# Altium PCB led_drv.PcbDoc
Units mm, origin at the board's own origin, x right, y up, seen from the top; angles counter-clockwise.
Board outline 90 x 50 mm, 2 copper layers (Top Layer, Bottom Layer); 122 components, 128 nets, 402 pads, 59 vias.
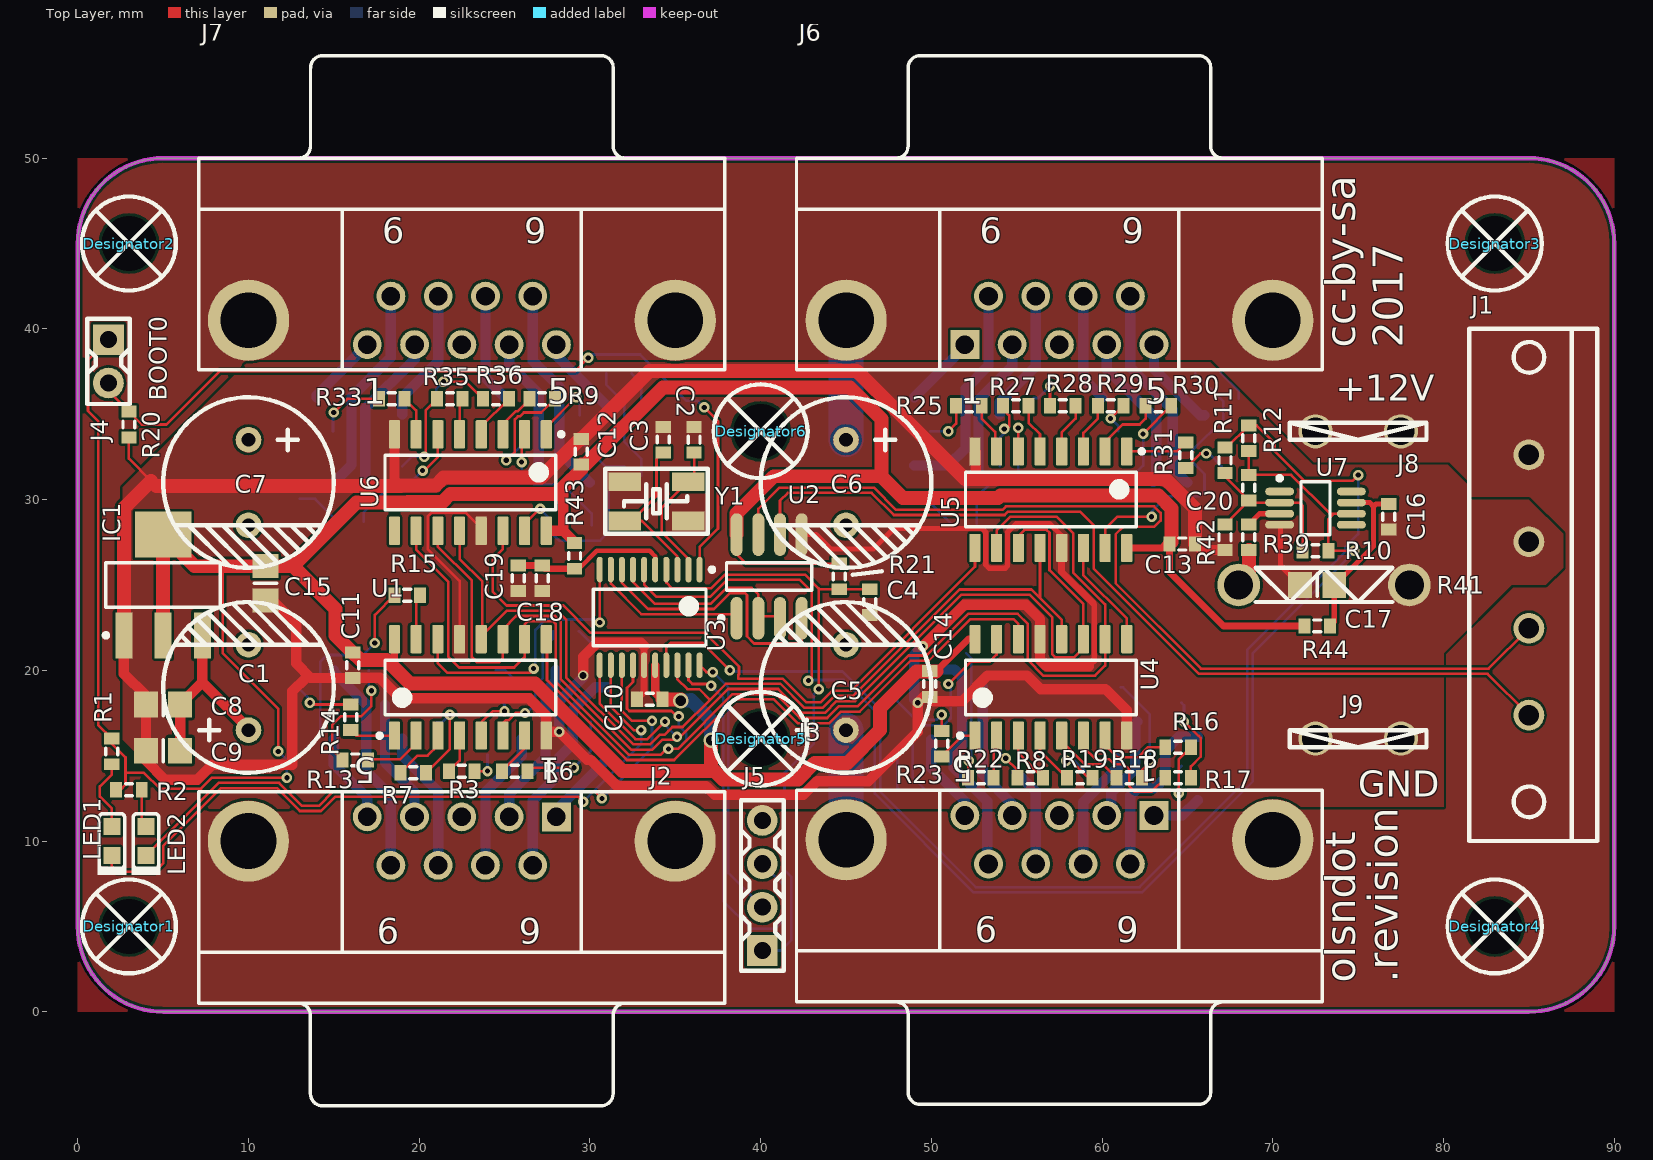
[diagram p0: Top Layer view]
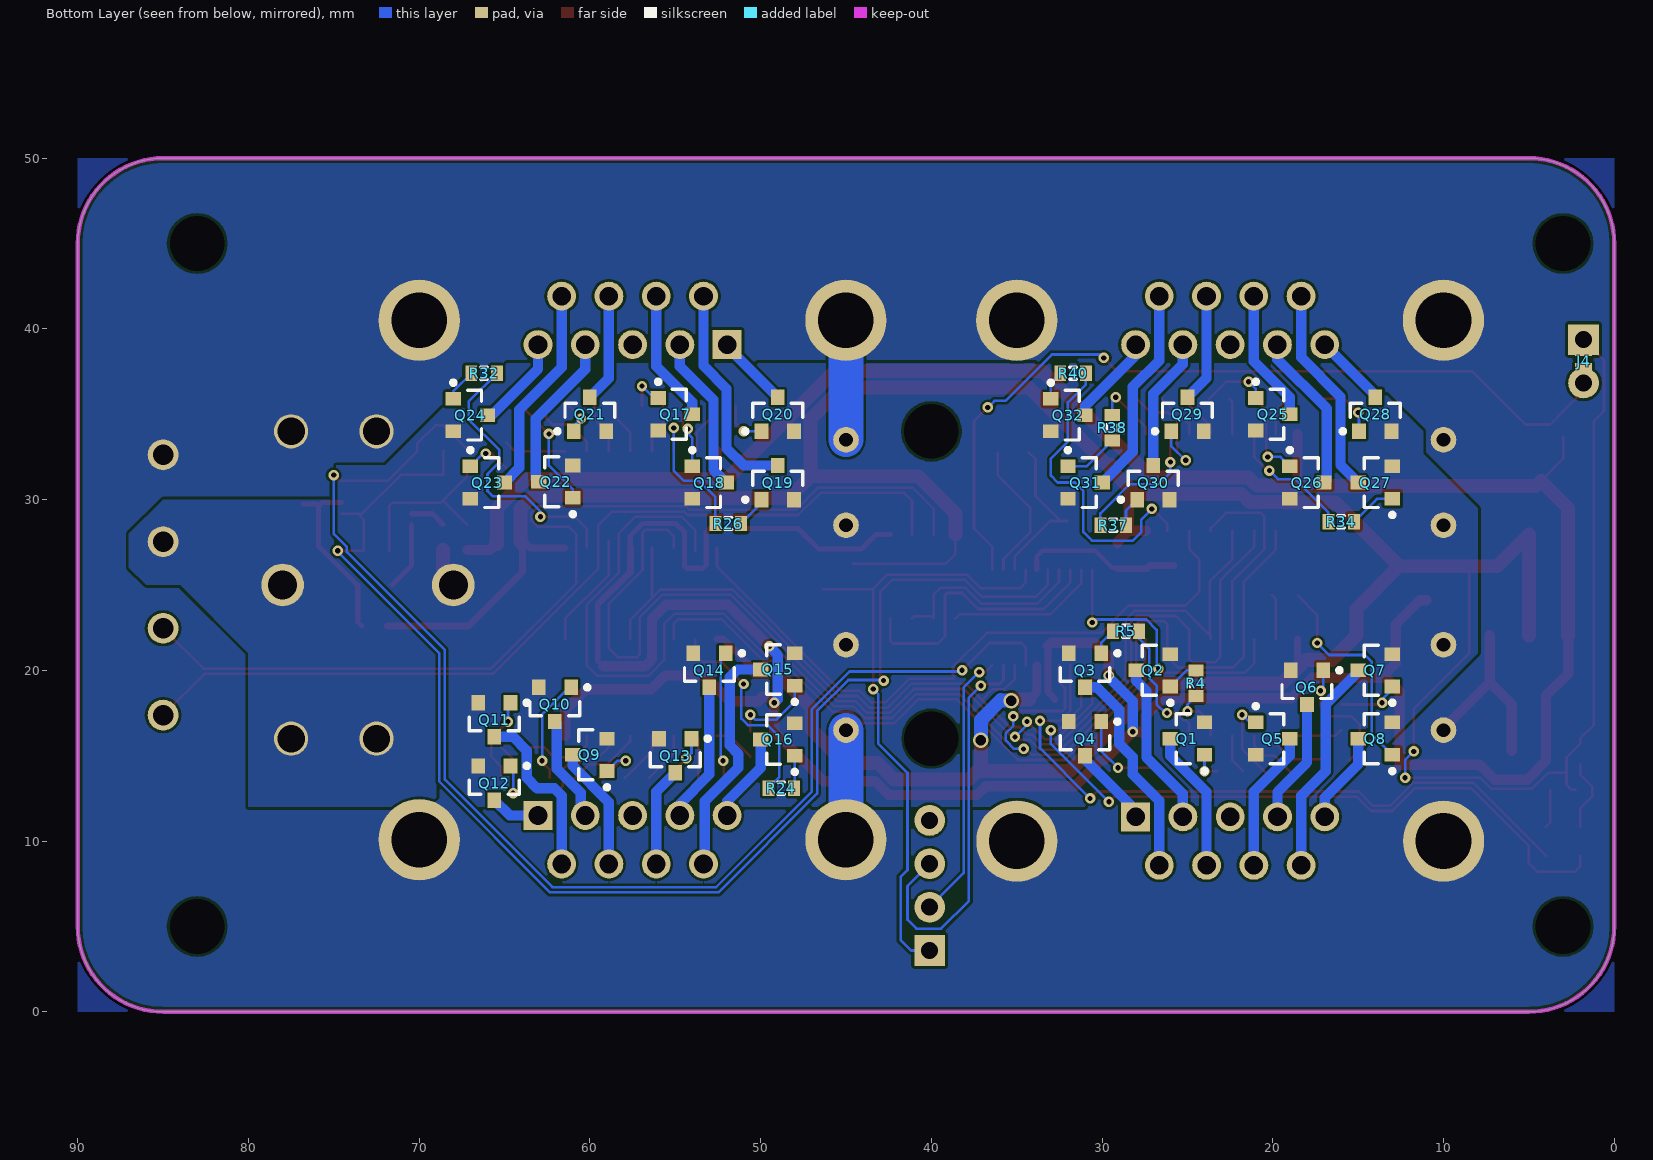
[diagram p1: Bottom Layer view, seen from below]

## Layer stack, top to bottom
Top Solder: solder mask 0.0102, Solder Resist, Dk 3.5
Top Layer: signal copper 0.0356
Dielectric1: dielectric 0.32, FR-4, Dk 4.8
Bottom Layer: signal copper 0.0356
Bottom Solder: solder mask 0.0102, Solder Resist, Dk 3.5

## Board outline
0,5 0,45 cw(c5,45) 5,50 85,50 cw(c85,45) 90,45 90,5 cw(c85,5) 85,0 5,0 cw(c5,5)

## Design rules (kind name [scope] priority, off if disabled: settings)
Clearance [All] p1: gap=0.152 ignorepadtopadclearanceinfootprint=FALSE except(0: Arc-Hole Track-Hole SMDPad-Hole THPad-Hole Via-Hole Fill-Hole Poly-Hole Region-Hole Text-Hole)
ComponentClearance [All] p1 off: gap=0.254 collisioncheckmode=3 verticalgap=0.254 showdistances=FALSE
FabricationTestPointUsage TestPointUsage [All] p1: valid=0 allowmultiple=FALSE
FabricationTestpoint Testpoint [All] p1: side=3 testpointundercomponent=TRUE minsize=1.016 maxsize=2.54 preferedsize=1.524 minholesize=0 maxholesize=1.016 preferedholesize=0.813 testpointgrid=0.025 allowsidetop=TRUE allowsidebottom=TRUE usegrid=TRUE gridtolerance=0
HoleSize [All] p1: absolutevalues=TRUE maxlimit=10 minlimit=0.025 maxpercent=80.000 minpercent=20.000
PolygonConnect PolygonConnect_power [All vs InNetClass('power')] p1: connectstyle=Direct reliefconductorwidth=0.254 reliefentries=4 polygonreliefangle="90 Angle" airgapwidth=0.254
PolygonConnect [All] p2: connectstyle=Relief reliefconductorwidth=0.254 reliefentries=4 polygonreliefangle="90 Angle" airgapwidth=0.254
RoutingVias [All] p1: holewidth=0.711 width=1.27 viastyle="Through Hole" minholewidth=0.254 minwidth=0.61 maxholewidth=25.4 maxwidth=25.4
SilkToSolderMaskClearance SilkscreenOverComponentPads [IsPad] p1: minsilkscreentomaskgap=0.254 clearancetoexposedcopper=TRUE
SolderMaskExpansion [All] p1: expansion=0.102
Width [All] p1: maxlimit=25.4 minlimit=0.152 preferedwidth=0.254 minimp=50.000000 maximp=50.000000 favimp=50.000000
25 further rules are at their usual default settings.

## Classes and differential pairs
net class power: +12V GND PGND
component class main: C1 C2 C3 C4 C5 C6 C7 C8 C9 C10 C11 C12 C13 C14 C15 C16 C17 C18 C19 C20 IC1 J1 J2 J3 J4 J5 J6 J7 J8 J9 LED1 LED2 Q1 Q2 Q3 Q4 Q5 Q6 Q7 Q8 Q9 Q10 Q11 Q12 Q13 Q14 Q15 Q16 Q17 Q18 Q19 Q20 Q21 Q22 Q23 Q24 Q25 Q26 Q27 Q28 Q29 Q30 Q31 Q32 R1 R2 R10 R11 R12 R13 R14 R15 R16 R17 R18 R19 R20 R21 R22 R23 R24 R25 R26 R27 R28 R29 R30 R31 R32 R33 R34 R35 R36 R37 R38 R39 R40 R41 R42 R43 R44 U1 U2 U3 U4 U5 U6 U7 Y1

## Components (designator, comment, footprint, x,y, rotation, side; value= is the part's Value field where it differs from the comment)
C1 "1000/25" ELKO_10mm_RM5 10,19 r90 top locked
C2 "22p" J1-0603 36.1,33.5 r270 top
C3 "22p" J1-0603 34.3,33.515 r90 top
C4 "47n" J1-0603 46.4,24 r270 top
C5 "1000/25" ELKO_10mm_RM5 45,19 r90 top locked
C6 "1000/25" ELKO_10mm_RM5 45,31 r270 top locked
C7 "1000/25" ELKO_10mm_RM5 10,31 r270 top locked
C8 "10u" 6-0805_M 5,18 r180 top
C9 "1u" 6-0805_M 5,15.3 r180 top
C10 "100n" J1-0603 33.5,18.3 r180 top
C11 "100n" J1-0603 16.1,20.3 r270 top
C12 "100n" J1-0603 29.5,32.8 r90 top
C13 "100n" J1-0603 64.7,27.4 r0 top
C14 "100n" J1-0603 49.9,19.2 r270 top
C15 "1u" 6-0805_M 11,25.1 r270 top
C16 "100n" J1-0603 76.8,29 r270 top
C17 "1u" 6-0805_M 72.6,25 r180 top
C18 "100n" J1-0603 27.2,25.4 r270 top
C19 "1u" J1-0603 25.8,25.4 r270 top
C20 "NP" J1-0603 68.6,30.7 r90 top
Designator1 "Comment" SCREW_M3 3,5 r0 top
Designator2 "Comment" SCREW_M3 3,45 r0 top
Designator3 "Comment" SCREW_M3 83,45 r0 top
Designator4 "Comment" SCREW_M3 83,5 r0 top
Designator5 "Comment" SCREW_M3 40,16 r0 top
Designator6 "Comment" SCREW_M3 40,34 r0 top
IC1 "AZ1117I" SOT223_M 5,25 r90 top
J1 "POWER_BUS" TB_5.08_4P_FLANGE 85,25 r0 top
J2 "Step 1/Strip 1,2/Channel 0-7" DSUB1.385-2H9#1 22.495,0.5 r180 top locked
J3 "Step 2/Strip 3,4/Channel 8-15" DSUB1.385-2H9#1 57.5,0.58 r180 top locked
J4 "BOOT_JMP" JUMPER_2P 1.8,38.1 r0 top
J5 "DEBUG" PINHD_4x1_100mil 40.1,7.4 r180 top
J6 "Step 3/Strip 5,6/Channel 16-23" DSUB1.385-2H9#1 57.5,50 r0 top locked
J7 "Step 4/Strip 7,8/Channel 24-31" DSUB1.385-2H9#2 22.5,50 r0 top locked
J8 "+12V" FS-P_6.35 75,34 r0 top
J9 "GND" FS-P_6.35 75,16 r0 top
LED1 "KP-1608MGC" KING-0603LED_GREEN_V 2,10 r90 top
LED2 "KP-1608MGC" KING-0603LED_GREEN_V 4,10 r90 top
Q1 "IRLML6244TRPbF" ONSC-SOT-23-3-318-08_V 25,16 r0 bottom
Q2 "IRLML6244TRPbF" ONSC-SOT-23-3-318-08_V 27,20 r0 bottom
Q3 "IRLML6244TRPbF" ONSC-SOT-23-3-318-08_V 31,20 r270 bottom
Q4 "IRLML6244TRPbF" ONSC-SOT-23-3-318-08_V 31,16 r270 bottom
Q5 "IRLML6244TRPbF" ONSC-SOT-23-3-318-08_V 20,16 r180 bottom
Q6 "IRLML6244TRPbF" ONSC-SOT-23-3-318-08_V 18,19 r270 bottom
Q7 "IRLML6244TRPbF" ONSC-SOT-23-3-318-08_V 14,20 r0 bottom
Q8 "IRLML6244TRPbF" ONSC-SOT-23-3-318-08_V 14,16 r0 bottom
Q9 "IRLML6244TRPbF" ONSC-SOT-23-3-318-08_V 60,15.05 r0 bottom
Q10 "IRLML6244TRPbF" ONSC-SOT-23-3-318-08_V 62.05,18 r270 bottom
Q11 "IRLML6244TRPbF" ONSC-SOT-23-3-318-08_V 65.6,17.1 r270 bottom
Q12 "IRLML6244TRPbF" ONSC-SOT-23-3-318-08_V 65.6,13.4 r270 bottom
Q13 "IRLML6244TRPbF" ONSC-SOT-23-3-318-08_V 55,15 r270 bottom
Q14 "IRLML6244TRPbF" ONSC-SOT-23-3-318-08_V 53,20 r270 bottom
Q15 "IRLML6244TRPbF" ONSC-SOT-23-3-318-08_V 49,20.05 r0 bottom
Q16 "IRLML6244TRPbF" ONSC-SOT-23-3-318-08_V 49,15.95 r0 bottom
Q17 "IRLML6244TRPbF" ONSC-SOT-23-3-318-08_V 55,35 r180 bottom
Q18 "IRLML6244TRPbF" ONSC-SOT-23-3-318-08_V 53,31 r180 bottom
Q19 "IRLML6244TRPbF" ONSC-SOT-23-3-318-08_V 49,31 r90 bottom
Q20 "IRLML6244TRPbF" ONSC-SOT-23-3-318-08_V 49,35 r90 bottom
Q21 "IRLML6244TRPbF" ONSC-SOT-23-3-318-08_V 60,35 r90 bottom
Q22 "IRLML6244TRPbF" ONSC-SOT-23-3-318-08_V 62,31.05 r0 bottom
Q23 "IRLML6244TRPbF" ONSC-SOT-23-3-318-08_V 66,31 r180 bottom
Q24 "IRLML6244TRPbF" ONSC-SOT-23-3-318-08_V 67,34.95 r180 bottom
Q25 "IRLML6244TRPbF" ONSC-SOT-23-3-318-08_V 20,35 r180 bottom
Q26 "IRLML6244TRPbF" ONSC-SOT-23-3-318-08_V 18,31 r180 bottom
Q27 "IRLML6244TRPbF" ONSC-SOT-23-3-318-08_V 14,31 r0 bottom
Q28 "IRLML6244TRPbF" ONSC-SOT-23-3-318-08_V 14,35 r90 bottom
Q29 "IRLML6244TRPbF" ONSC-SOT-23-3-318-08_V 25,35 r90 bottom
Q30 "IRLML6244TRPbF" ONSC-SOT-23-3-318-08_V 27,31 r90 bottom
Q31 "IRLML6244TRPbF" ONSC-SOT-23-3-318-08_V 31,31 r180 bottom
Q32 "IRLML6244TRPbF" ONSC-SOT-23-3-318-08_V 32,34.95 r180 bottom
R1 "180" J1-0603 2,15.25 r90 top
R2 "180" J1-0603 3,13 r180 top
R3 "180" J1-0603 22.5,14.1 r180 top
R4 "180" J1-0603 24.5,19.25 r270 bottom
R5 "180" J1-0603 28.6,22.3 r180 bottom
R6 "180" J1-0603 25.6,14.1 r180 top
R7 "180" J1-0603 19.65,14 r180 top
R8 "180" J1-0603 55.8,13.7 r0 top
R9 "180" J1-0603 27.2,35.9 r180 top
R10 "47k" J1-0603 72.5,27 r0 top
R11 "3k3" J1-0603 67.2,32.3 r90 top
R12 "3k3" J1-0603 68.6,33.6 r270 top
R13 "180" J1-0603 16.25,14.75 r0 top
R14 "180" J1-0603 16,17.25 r270 top
R15 "180" J1-0603 19.3,24.4 r0 top
R16 "180" J1-0603 64.45,15.5 r180 top
R17 "180" J1-0603 64.45,13.7 r180 top
R18 "180" J1-0603 61.6,13.7 r180 top
R19 "180" J1-0603 58.7,13.7 r180 top
R20 "47k" J1-0603 3,34.4 r90 top
R21 "47k" J1-0603 44.6,25.5 r90 top
R22 "180" J1-0603 52.9,13.7 r0 top
R23 "180" J1-0603 50.6,15.7 r270 top
R24 "180" J1-0603 48.8,13.1 r0 bottom
R25 "180" J1-0603 52.2,35.5 r0 top
R26 "180" J1-0603 51.9,28.6 r0 bottom
R27 "180" J1-0603 54.95,35.5 r0 top
R28 "180" J1-0603 57.7,35.5 r0 top
R29 "180" J1-0603 60.5,35.5 r180 top
R30 "180" J1-0603 63.3,35.5 r180 top
R31 "180" J1-0603 64.9,32.6 r90 top
R32 "180" J1-0603 66.2,37.4 r180 bottom
R33 "180" J1-0603 18.4,35.9 r0 top
R34 "180" J1-0603 16,28.7 r0 bottom
R35 "180" J1-0603 21.8,35.9 r0 top
R36 "180" J1-0603 24.5,35.9 r0 top
R37 "180" J1-0603 29.35,28.5 r0 bottom
R38 "180" J1-0603 29.4,34.2 r90 bottom
R39 "100" J1-0603 68.6,27.8 r90 top
R40 "180" J1-0603 31.7,37.4 r180 bottom
R41 "0R005" 10x1.5mm_Shunt 73,25 r0 top
R42 "100" J1-0603 67.2,27.8 r90 top
R43 "100" J1-0603 29.1,26.7 r270 top
R44 "100" J1-0603 72.6,22.6 r0 top
U1 "SN74HC595DR" D0016A_M 23,19 r90 top locked
U2 "ST1480ACDR" SO8_M 40.5,25.5 r90 top
U3 "STM32F030F4P6" STM-TSSOP20_L 33.5,23.1 r270 top locked
U4 "SN74HC595DR" D0016A_M 57,19 r90 top locked
U5 "SN74HC595DR" D0016A_M 57,30 r270 top locked
U6 "SN74HC595DR" D0016A_M 23,31 r270 top locked
U7 "MCP6V26-E/MS" MSOP-MS8_N 72.5,29.5 r0 top
Y1 "ABM3B-8.0000MHZ-B2-T" XTAL_MJ_5x3.2 33.9,29.9 r180 top

## Footprints (in the part's own frame and the unit in brackets; to place one, negate y for a bottom-side part, rotate by r counter-clockwise, add the part's x,y. Pads: shape width x height; smd on the part's side, far side on the other; paste and mask are expansions set on the pad)
6-0805_M [mm] "Chip Resistor, Body 2.0x1.2mm, IPC Low Density"
  rect 1.4x1.5 smd: 1(-1,0) 2(1,0)
  silkscreen extent 0,-0.65 0,0.65, body extent -1.07,-0.7 1.07,0.7, height 0.7
10x1.5mm_Shunt [mm]
  round 2.5 hole 1.7: 1(-5,0) 2(5,0)
  silkscreen extent -4,-1 4,1
D0016A_M [mm] "SOIC, 16-Leads, Body 10x4mm, Pitch 1.27mm, IPC Low Density"
  rrect15% 1.65x0.65 smd: 1(-2.825,4.445) 2(-2.825,3.175) 3(-2.825,1.905) 4(-2.825,0.635) 5(-2.825,-0.635) 6(-2.825,-1.905) 7(-2.825,-3.175) 8(-2.825,-4.445) 9(2.825,-4.445) 10(2.825,-3.175) 11(2.825,-1.905) 12(2.825,-0.635) 13(2.825,0.635) 14(2.825,1.905) 15(2.825,3.175) 16(2.825,4.445)
  silkscreen extent -2.95,-5 1.6,5.44, body extent -3,-4.95 3,4.95, height 1.59
DSUB1.385-2H9#1 [mm] "Connector; D Subminiature; 9 Position; Right Angle; Pitch 1.385 mm"
  rect 1.69x1.69 hole 1.09: 1(-5.54,-10.92)
  round 1.69 hole 1.09: 2(-2.77,-10.92) 3(0,-10.92) 4(2.77,-10.92) 5(5.54,-10.92) 6(-4.155,-8.08) 7(-1.385,-8.08) 8(1.385,-8.08) 9(4.155,-8.08)
  round 4.76 hole 3.26: 10(-12.495,-9.5) 11(12.495,-9.5)
  silkscreen extent -15.4,-12.4 15.4,6
DSUB1.385-2H9#2 [mm] "Connector; D Subminiature; 9 Position; Right Angle; Pitch 1.385 mm"
  round 1.69 hole 1.09: 1(-5.54,-10.92) 2(-2.77,-10.92) 3(0,-10.92) 4(2.77,-10.92) 5(5.54,-10.92) 6(-4.155,-8.08) 7(-1.385,-8.08) 8(1.385,-8.08) 9(4.155,-8.08)
  round 4.76 hole 3.26: 10(-12.495,-9.5) 11(12.495,-9.5)
  silkscreen extent -15.4,-12.4 15.4,6
ELKO_10mm_RM5 [mm]
  round 1.5 hole 0.8: 1(-2.5,0) 2(2.5,0)
  silkscreen extent -5,-5 5,5
FS-P_6.35 [mm]
  round 2 hole 1.6: 1(-2.5,0) 1(2.5,0)
  silkscreen extent -4,-0.5 4,0.5
J1-0603 [mm]
  rect 0.7x0.9 smd: 1(-0.75,0) 2(0.75,0)
  silkscreen extent -0.2,-0.35 0.2,0.35, body extent -0.85,-0.48 0.85,0.48, height 0.9
JUMPER_2P [mm]
  rect 1x0.6 smd far side: 1(0,0.6) 2(0,-0.4)
  rect 1.8x1.8 hole 1: 1(0,1.27)
  round 1.8 hole 1: 2(0,-1.27)
  silkscreen extent -1.25,-2.5 1.25,2.5
KING-0603LED_GREEN_V [mm] "SMT LED, 2-Leads, Body 1.6x0.8mm (0603-Size)"
  rect 1x1 smd paste+0 mask+0: 1(0.85,0) 2(-0.85,0)
  silkscreen extent -1.97,-0.85 1.6,0.85, body extent -0.92,-0.53 1.09,0.53, height 1.1
MSOP-MS8_N [mm] "TSOP, 8-Leads, Body 3x3mm, Pitch 0.65mm, IPC Medium Density"
  oval 1.7x0.45 smd: 1(-2.1,0.975) 2(-2.1,0.325) 3(-2.1,-0.325) 4(-2.1,-0.975) 5(2.1,-0.975) 6(2.1,-0.325) 7(2.1,0.325) 8(2.1,0.975)
  silkscreen extent -2.22,-1.55 0.85,1.87, body extent -1.55,-1.55 1.55,1.55, height 1.1
ONSC-SOT-23-3-318-08_V [mm] "SOT23, 3-Leads, Body 2.92x1.3mm, Pitch 0.95mm"
  rect 0.9x0.8 smd: 1(-1,0.95) 2(-1,-0.95) 3(1,0)
  silkscreen extent -1.12,-1.46 0.65,2.02, body extent -0.65,-1.46 0.65,1.46, height 1.11
PINHD_4x1_100mil [mm]
  rect 1.8x1.8 hole 1: 1(0,3.81)
  round 1.8 hole 1: 2(0,1.27) 3(0,-1.27) 4(0,-3.81)
  silkscreen extent -1.25,-5 1.25,5
SCREW_M3 [mm]
  round 0 hole 3.2 unplated: 1(0,0)
  silkscreen extent -2.75,-2.75 2.75,2.75
SO8_M [mm] "SOIC, 8-Leads, Body 4.9x3.9mm, Pitch 1.27mm, IPC Low Density"
  oval 2.5x0.7 smd: 1(-2.45,1.905) 2(-2.45,0.635) 3(-2.45,-0.635) 4(-2.45,-1.905) 5(2.45,-1.905) 6(2.45,-0.635) 7(2.45,0.635) 8(2.45,1.905)
  silkscreen extent -2.57,-2.5 0.8,2.93, body extent -2,-2.5 2,2.5, height 1.75
SOT223_M [mm] "SOT223, 4-Leads, Body 6.5x3.5mm, Pitch 2.3mm, Lead Span 7mm, IPC Low Density"
  rect 2.7x1 smd: 1(-2.95,2.3) 2(-2.95,0) 3(-2.95,-2.3)
  rect 2.7x3.3 smd: 4(2.95,0)
  silkscreen extent -3.07,-3.35 1.3,3.47, body extent -1.85,-3.35 1.85,3.35, height 1.7
STM-TSSOP20_L [mm] "SOP, 20-Leads, Body 6.6x4.5mm, Pitch 0.65mm, IPC High Density"
  oval 1.5x0.35 smd: 1(-2.8,2.925) 2(-2.8,2.275) 3(-2.8,1.625) 4(-2.8,0.975) 5(-2.8,0.325) 6(-2.8,-0.325) 7(-2.8,-0.975) 8(-2.8,-1.625) 9(-2.8,-2.275) 10(-2.8,-2.925) 11(2.8,-2.925) 12(2.8,-2.275) 13(2.8,-1.625) 14(2.8,-0.975) 15(2.8,-0.325) 16(2.8,0.325) 17(2.8,0.975) 18(2.8,1.625) 19(2.8,2.275) 20(2.8,2.925)
  silkscreen extent -2.92,-3.3 1.65,3.78, body extent -2.25,-3.3 2.25,3.3, height 1.2
TB_5.08_4P_FLANGE [mm] "Pluggable Terminal Block, vertical, pitch 5.08mm, with flange"
  round 1.8 hole 1.2: 1(0,7.62) 2(0,2.54) 3(0,-2.54) 4(0,-7.62)
  silkscreen extent -3.5,-15 4,15
XTAL_MJ_5x3.2 [mm]
  rect 1.9x1.1 smd: 1(-1.85,-1.15) 2(1.85,-1.15) 3(1.85,1.15) 4(-1.85,1.15)
  silkscreen extent -3,-1.9 3,1.9

## Part data
C1 C5 C6 C7: library part ELKO, Mfg Part No=EEUFR1E102B, Mfg=Panasonic
C2 C3 C4 C8 C9 C10 C11 C12 C13 C14 C15 C16 C17 C18 C19 C20: library part C, "Capacitor"
IC1: "LDO, industrial temp range"
J1: library part Phoenix_PT1,5/4-5,0H
J2 J3 J6 J7: library part "D Connector 9", "Receptacle Assembly, 9 Position, Right Angle", PackageDocument=O, DatasheetDocument=1-Sep-1999, Gender=Receptacle, LatestRevisionDate=17-Jul-2002, LatestRevisionNote="Re-released for DXP Platform.", Orientation="Right Angle", PackageReference=788750, Positions=9, Published=15-Jun-2001, Publisher="Altium Limited"
J4: library part JUMPER, "Jumper"
J5: library part PH_4x1, "Pin Header 4x1 pin"
J8 J9: library part TESTPOINT
LED1 LED2: library part CMP-0404-00001-1, "LED, SMT, 0603(1608), 1.1mm thickness, Green", Forward Current="30 mA", Manufacturer=Kingbright, Power Dissipation="75 mW", Reverse Voltage="5 V", Storage Temperature="-40 to +85 degC", ComponentLink1Description="Manufacturer URL", ComponentLink1URL=http://www.kingbright.com/, Mounting Technology="Surface Mount", PackageDescription="2-Pin SMT LED, 1.6 x 0.8 mm Pitch", PackageReference=0603LED_GREEN, Packing Type="2000 pcs / reel", PartNumber=KP-1608MGC
Q1 Q2 Q3 Q4 Q5 Q6 Q7 Q8 Q9 Q10 Q11 Q12 Q13 Q14 Q15 Q16 Q17 Q18 Q19 Q20 Q21 Q22 Q23 Q24 Q25 Q26 Q27 Q28 Q29 Q30 Q31 Q32: library part CMP-1058-00794-1, "Power MOSFET, 500 mA, 60 V, N-Channel, 3-Pin SOT-23, Pb-Free, Tape and Reel", Manufacturer="On Semiconductor", Package Type=SOT-23-3, PartNumber=NVBF170LT1G, Channel Polarity="N Channel", ComponentLink1Description="Manufacturer URL", ComponentLink1URL=http://www.onsemi.com/, ComponentLink2Description=Datasheet, ComponentLink2URL=http://www.onsemi.cn/pub_link/Collateral/MMBF170LT1-D.PDF, ComponentLink3Description="Package Specification", ComponentLink3URL=http://www.onsemi.cn/pub_link/Collateral/318-08.PDF, Configuration=Single, DatasheetVersion="Rev. 9", ID Max (A)=0.5, Mounting Technology="Surface Mount", PackageDescription="3-Pin Small Outline Transistor, Body 2.92 x 1.3 mm, Pitch 0.95 mm", PackageReference=SOT-23-3-318-08, PackageVersion="Rev. AP, 11/2009", Packing="Tape and Reel", PD Max (W)=0.225, RoHS=Pb-Free, V(BR)DSS Min (V)=60, VGS(th) Max (V)=3, VGS Max (V)=20
R1 R2 R3 R4 R5 R6 R7 R8 R9 R10 R11 R12 R13 R14 R15 R16 R17 R18 R19 R20 R21 R22 R23 R24 R25 R26 R27 R28 R29 R30 R31 R32 R33 R34 R35 R36 R37 R38 R39 R40 R41 R42 R43 R44: library part R, "Resistor"
  R41: mechanical="10mm lead spacing 1.5mm dia MnCu shunt"
U1 U4 U5 U6: library part CMP-0780-00037-3, "8-Bit Shift Registers With 3-State Output Registers, D0016A, LARGE T&R", F @ Nom Voltage(Max)(Mhz)=28, Generic Part Number=SN74HC595, ICC @ Nom Voltage(Max)(mA)=0.08, Manufacturer="Texas Instruments", Operating Temperature Range(C)="-40 to 85", Rating=Military, tpd @ Nom Voltage(Max)(ns)=34, Voltage(Nom)(V)=6, 3-State Output=Yes, Bits=4, Code_JEDEC="MS-012 variation AC", DatasheetVersion=SCLS041H, Input Type=CMOS, Output Drive (IOL/IOH)(Max)(mA)=7.8/-7.8, Output Type=CMOS, PackageReference=D0016A, PackageVersion=http://www.ti.com/lit/ml/mpds178g/mpds178g.pdf, Technology Family=HC, VCC(Max)(V)=6, VCC(Min)(V)=2
U2: library part IN-LNTX-DS75176B, "Multipoint RS-485/RS-422 Transceiver, 8-pin Narrow SOIC", Manufacturer="National Semiconductor", PackageTopMarking=NSZXTT*DS751*76BM, PowerWise=N, Code_IPC=SOIC127P600-8, Code_JEDEC=MS-012-AA, CompType="Interface IC", DatasheetVersion=Jul-2004, PackageDescription="SOIC Narrow, 4.9 x 3.9 x 1.45mm, 8 Lead, 1.27mm Pitch", PackageReference=M08A, PackageVersion="revM, May-2009", PinCount=8, RoHS=N
U3: library part CMP-0304-00039-2, "ARM Cortex-M0 32-bit MCU, 16 KB Flash, 4 KB Internal RAM, 15 I/Os, 20-pin TSSOP, -40 to 85 degC, Tube", I/Os (High Current)=15, Operating Frequency(F) (Processor speed) (MHz)=48, Supply Voltage(Vcc) min (V)=2.4, ComponentLink1Description="Manufacturer URL", ComponentLink1URL=http://www.st.com/web/en/home.html, ComponentLink2Description=Datasheet, ComponentLink2URL=http://www.st.com/st-web-ui/static/active/en/resource/technical/document/datasheet/DM00088500.pdf, ComponentLink3Description="Package Specification", ComponentLink3URL=http://www.st.com/st-web-ui/static/active/en/resource/technical/document/datasheet/DM00065136.pdf, Core="ARM Cortex-M0", DatasheetVersion="Rev. 1", FLASH Size (Prog) (kB)=16, Internal RAM Size (kB)=4, Mounting Technology="Surface Mount", PackageDescription="20-Pin Thin Shrink Small Outline Package, 6.5 x 4.4 mm Body, 0.65 mm Pitch", PackageReference=TSSOP20, PackageVersion="Rev. 1, 11/2012", Packing=Tube, PartNumber=STM32F030F4P6
U7: library part CMP-0187-00815-1, "620 μA, 2 MHz Auto-Zeroed Op Amp, 8-Pin MSOP, Extended Temperature", ComponentLink1Description="Manufacturer URL", ComponentLink1URL=http://www.microchip.com/, ComponentLink2Description=Datasheet, ComponentLink2URL=http://ww1.microchip.com/downloads/en/DeviceDoc/25007B.pdf, ComponentLink3Description="Package Specification", ComponentLink3URL=http://www.microchip.com/stellent/groups/techpub_sg/documents/packagingspec/en012702.pdf, DatasheetVersion="revB, Aug-2011", PackageDescription="8-Lead Plastic Micro Small Outline Package (MS) [MSOP]", PackageReference=MSOP-MS8, PackageVersion="revBB, Aug-2009"
Y1: library part ABRA-ABM3B-4, "Crystal, SMD, 25.000000MHz Stab=50ppm 18.0pF", Case Size="5.0 x 3.2 mm", Manufacturer=Abracon, PartNumber=ABM3B-25.000MHZ-B2-T, Storage Temperature="-40 to 80 degC", Body Shape=Rectangular, ComponentLink1Description="Manufacturer URL", ComponentLink1URL=http://www.abracon.com/, ComponentLink2Description=Datasheet, ComponentLink2URL=http://www.abracon.com/Resonators/abm3b.pdf, DatasheetVersion=Apr-13, Mounting Technology="Surface Mount", Note="Take care of different package scales", PackageDescription="4-Pin SMT Crystal, 5.2 x 3.4 mm Body", PackageReference=ABM3B, Packing Type="Tape & Reel"

## Via types
v1: diameter 0.61, hole 0.305, Top Layer to Bottom Layer, tented both sides, 56 vias
v2: diameter 0.914, hole 0.61, Top Layer to Bottom Layer, tented both sides, 2 vias
v3: diameter 0.61, hole 0.406, Top Layer to Bottom Layer, tented both sides, 1 vias

## Nets (pads, with @x,y where several pads share a name; then routed paths per layer and width w, separated by ;. In a path a pad name is that pad's centre, name@x,y a point inside that pad or via, vN(x,y) a via of type N, cw(c..) or ccw(c..) an arc to the next point about the centre after c; other vN are vias at no path point)
+12V: C1.1 C5.1 C6.1 C7.1 C8.1 C9.1 IC1.3 J1.1 J2.10 J2.11 J3.10 J3.11 J6.10 J6.11 J7.10 J7.11 J8.1 | length 24.6
  Top Layer w0.61: C9.1 C8.1 7.3,19.3 ; IC1.3 7.3,19.3 ; C1.1 10,16.6 7.3,19.3
  Bottom Layer w2.032: J7.10@10,40.495 J7.10 ; C5.1 45,10.085 J3.11 ; C6.1 45,40.495 J6.10
AVCC: C16.1 C17.1 R44.2 U7.7 | length 10.5
  Top Layer w0.305: R44.2 73.6,22.85 C17.1 73.629,25 75.9,27.271 75.9,29.6 ; U7.7@74.55,29.825 U7.7 75.675,29.825 75.9,29.6 ; C16.1 76.05,29.75 75.9,29.6
AVCC2: C18.1 C19.1 R43.2 U3.5 | length 9.5
  Top Layer w0.254: R43.2 29.15,26 29.4,26 30.4,27 33.5,27 33.825,26.675 U3.5@33.825,26.375
  Top Layer w0.305: U3.5 U3.5@33.825,26.375
  Top Layer w0.406: C19.1 C18.1 27.4,25.95 R43.2
BOOT0: J4.2 R20.2 U3.1 | length 49.4
  Top Layer w0.152: J4.2@1.8,36.83 1.8,36.35 R20.2 3.75,34.4 5.2,34.4 8.317,37.517 29.117,37.517 v1(29.9,38.3) ; U3.1 36.425,27.225 37.5,28.3 37.5,34.6 v1(36.7,35.4)
  Bottom Layer w0.152: v1(29.9,38.3) 30.1,38.5 32.938,38.5 35.651,35.787 36.313,35.787 v1(36.7,35.4)
CH0: J2.1 Q4.3 | length 4.8
  Bottom Layer w0.61: J2.1 28.035,11.813 29.284,13.062 31,14.778 Q4.3
CH1: J2.6 Q3.3 | length 12.7
  Bottom Layer w0.61: J2.6@26.572,8.163 J2.6@26.655,8.08 ; J2.6 26.65,12.372 28.2,13.922 28.2,14.9 29,15.7 29,17.7 30.3,19 Q3.3
CH2: J2.2 Q2.3 | length 10.2
  Bottom Layer w0.61: J2.2@25.27,10.92 25.27,12.77 27.4,14.9 27.4,18.8 28,19.4 Q2.3
CH3: J2.7 Q1.3 | length 8.8
  Bottom Layer w0.61: J2.7@23.885,8.08 23.885,12.885 26,15 Q1.3
CH4: J2.8 Q5.3 | length 8.8
  Bottom Layer w0.61: Q5.3 19,15 21.115,12.885 J2.8@21.115,8.08
CH5: J2.4 Q6.3 | length 7.3
  Bottom Layer w0.61: Q6.3 18,14.6 19.725,12.875 J2.4
CH6: J2.9 Q7.3 | length 13.3
  Bottom Layer w0.61: Q7.3 15,19.922 16.9,18.022 16.9,14.1 18.345,12.655 J2.9@18.345,8.08
CH7: J2.5 Q8.3 | length 5.9
  Bottom Layer w0.61: Q8.3 15,14.5 16.96,12.54 J2.5@16.96,10.92
CH8: J3.1 Q12.3 | length 2.9
  Bottom Layer w0.61: J3.1 64.7,11.5 Q12.3
CH9: J3.6 Q11.3 | length 10.3
  Bottom Layer w0.61: J3.6 61.655,12.655 62.1,13.1 63.1,13.1 63.7,13.7 63.7,15.3 64.5,16.1 Q11.3
CH10: J3.2 Q10.3 | length 6.3
  Bottom Layer w0.61: J3.2 60.652,11.882 60.544,11.99 60.544,12.844 61.938,14.238 61.938,16.888 Q10.3
CH11: J3.7 Q9.3 | length 7.3
  Bottom Layer w0.61: J3.7 58.885,12.285 61,14.4 Q9.3
CH12: J3.8 Q13.3 | length 5.8
  Bottom Layer w0.61: Q13.3 56.115,12.885 J3.8
CH13: J3.4 Q14.3 | length 8.2
  Bottom Layer w0.61: Q14.3 53,13.9 54.73,12.17 J3.4
CH14: J3.9 Q15.3 | length 14
  Bottom Layer w0.61: Q15.3 51.35,20.05 51.8,19.6 51.8,15.6 51.3,15.1 51.3,14.3 53.262,12.338 53.262,8.743 J3.9
CH15: J3.5 Q16.3 | length 5.3
  Bottom Layer w0.61: Q16.3 50,14.3 51.96,12.34 J3.5
CH16: J6.1 Q20.3 | length 4.3
  Bottom Layer w0.61: Q20.3 51.96,38.96 J6.1
CH17: J6.6 Q19.3 | length 12.9
  Bottom Layer w0.61: Q19.3 51,32 52,33 52,36.5 53.345,37.845 J6.6
CH18: J6.2 Q18.3 | length 9.2
  Bottom Layer w0.61: Q18.3 52.762,31.762 52.762,35.84 54.73,37.808 J6.2
CH19: J6.7 Q17.3 | length 7.8
  Bottom Layer w0.61: Q17.3 54,35.7 56.115,37.815 J6.7
CH20: J6.8 Q21.3 | length 6.4
  Bottom Layer w0.61: J6.8 58.885,37.115 Q21.3
CH21: J6.4 Q22.3 | length 9.3
  Bottom Layer w0.61: J6.4 60.27,37.63 63.162,34.738 63.162,31.212 Q22.3
CH22: J6.9 Q23.3 | length 12.3
  Bottom Layer w0.61: J6.9 61.655,37.745 64.138,35.262 64.138,31.862 Q23.3
CH23: J6.5 Q24.3 | length 5.5
  Bottom Layer w0.61: J6.5 63.04,37.66 65.75,34.95 Q24.3
CH24: J7.1 Q28.3 | length 4.3
  Bottom Layer w0.61: Q28.3 14,36.12 J7.1
CH25: J7.6 Q27.3 | length 12.3
  Bottom Layer w0.61: Q27.3 16.038,32.038 16.038,36.038 18.345,38.345 J7.6
CH26: J7.2 Q26.3 | length 9.3
  Bottom Layer w0.61: Q26.3 16.838,31.162 16.838,35.338 19.73,38.23 J7.2
CH27: J7.7 Q25.3 | length 7.8
  Bottom Layer w0.61: Q25.3 19,36 21.115,38.115 J7.7
CH28: J7.8 Q29.3 | length 6.4
  Bottom Layer w0.61: J7.8 23.885,37.115 Q29.3
CH29: J7.4 Q30.3 | length 7.8
  Bottom Layer w0.61: J7.4 25.27,37.93 27,36.2 Q30.3
CH30: J7.9 Q31.3 | length 12.3
  Bottom Layer w0.61: J7.9 26.655,38.145 28.2,36.6 28.2,32.8 Q31.3
CH31: J7.5 Q32.3 | length 5.4
  Bottom Layer w0.61: J7.5 28.04,38.46 31,35.5 Q32.3
CLR: U1.10 U3.14 U4.10 U5.10 U6.10 | length 85.6
  Top Layer w0.152: U6.10 19.825,27.075 21.7,25.2 21.7,20.8 22.335,20.165 25.565,20.165 26.175,20.775 U1.10@26.175,21.7 ; U1.10 26.175,22.675 26.379,22.879 27.836,22.879 27.999,22.716 27.999,19.342 32.288,15.052 34.148,15.052 34.548,15.452 v1(34.6,15.4) 35.154,15.4 38.359,18.605 40.902,18.605 42.297,17.21 43.895,17.21 44.571,17.886 45.679,17.886 48.66,20.867 49.721,20.867 50.033,21.179 52.159,23.305 55.06,23.305 55.649,22.716 55.649,20.597 56.551,19.695 59.595,19.695 60.175,20.275 U4.10 60.175,23.867 58.3,25.742 58.3,28.039 57.349,28.99 57.072,28.99 54.612,28.991 53.825,28.203 U5.10 U5.10@53.825,27 ; U3.14 32.525,19.325 32.171,18.971 32.171,17.755 32.305,17.621 34.781,17.621 35.2,17.202 v1(35.2,17.3)
  Bottom Layer w0.152: v1(34.6,15.4) 35.154,15.4 35.633,15.879 35.633,16.321 35.2,16.754 v1(35.2,17.3)
DC1: U1.9 U4.14 | length 37.5
  Top Layer w0.152: U1.9 27.486,21.784 27.486,19.424 32.162,14.747 34.933,14.747 38.485,18.3 40.776,18.3 42.17,16.905 44.021,16.905 44.697,17.581 45.805,17.581 48.786,20.562 49.847,20.562 50.338,21.053 52.285,23 54.8,23 55.095,22.705 U4.14
DC2: U4.9 U5.14 | length 6.8
  Top Layer w0.152: U5.14@58.905,27.595 U5.14 58.905,25.568 61.445,23.028 U4.9
DC3: U5.9 U6.14 | length 39.6
  Top Layer w0.152: U6.14 24.905,27.1 24.3,26.495 24.3,24.616 25.116,23.8 28.443,23.8 30.043,22.2 36.754,22.2 38.733,20.221 38.733,19.779 38.681,19.726 38.681,19.519 41.281,19.519 42.675,18.125 43.516,18.125 44.192,18.8 45.283,18.8 52.555,26.072 U5.9
DRV0: R6.2 U1.7 | length 2.6
  Top Layer w0.152: R6.2 26.175,15.425 U1.7
DRV1: R5.2 U1.6 | length 7.8
  Top Layer w0.152: U1.6 24.905,16.905 25.067,17.067 25.221,17.067 25.654,17.5 v1(26.2,17.5)
  Bottom Layer w0.152: v1(26.2,17.5) 26.3,17.5 26.8,18 26.8,19.1 27.233,19.533 27.233,21.25 27.85,21.867 R5.2
DRV2: R4.2 U1.5 | length 3.5
  Top Layer w0.152: U1.5 23.635,16.935 24.3,17.6 v1(25,17.6)
  Bottom Layer w0.152: R4.2 25,18 v1(25,17.6)
DRV3: R3.2 U1.4 | length 2.3
  Top Layer w0.152: R3.2 22.365,14.715 U1.4
DRV4: R7.2 U1.3 | length 3.4
  Top Layer w0.152: R7.2 19.9,15 20.5,15 21.095,15.595 U1.3
DRV5: R13.2 U1.2 | length 3.7
  Top Layer w0.152: R13.2 17.05,14.8 18.9,14.8 19.825,15.725 U1.2
DRV6: R14.2 U1.1 | length 2.7
  Top Layer w0.152: R14.2 16.325,16.175 U1.1
DRV7: R15.2 U1.15 | length 2.7
  Top Layer w0.152: U1.15 19.825,24.175 R15.2
DRV8: R16.2 U4.7 | length 4.6
  Top Layer w0.152: U4.7 60.175,15.625 60.9,14.9 62.1,14.9 62.7,15.5 R16.2
DRV9: R17.2 U4.6 | length 7.5
  Top Layer w0.152: U4.6 58.905,15.495 59.6,14.8 60.4,14.8 60.7,14.5 61.295,14.5 61.6,14.195 61.6,13.2 61.9,12.9 62.9,12.9 R17.2
DRV10: R18.2 U4.5 | length 4.4
  Top Layer w0.152: U4.5 57.635,15.865 59.005,14.495 60.055,14.495 R18.2
DRV11: R19.2 U4.4 | length 3.1
  Top Layer w0.152: U4.4 56.365,15.285 R19.2
DRV12: R8.2 U4.3 | length 3.1
  Top Layer w0.152: U4.3 55.095,15.155 R8.2
DRV13: R22.2 U4.2 | length 2.5
  Top Layer w0.152: R22.2 53.65,16 U4.2
DRV14: R23.2 U4.1 | length 2.5
  Top Layer w0.152: R23.2 51.825,16.175 U4.1
DRV15: R24.2 U4.15 | length 12.5
  Top Layer w0.152: v1(51,19.2) 52.3,20.5 53.4,20.5 53.825,20.925 U4.15
  Bottom Layer w0.152: R24.2 48.9,13.75 48.9,16.1 49.595,16.795 50.75,16.795 51.133,17.179 51.133,19.066 v1(51,19.2)
DRV16: R25.2 U5.7 | length 3
  Top Layer w0.152: R25.2 52.95,34.75 53.732,33.968 53.732,32.918 U5.7
DRV17: R26.2 U5.6 | length 8.5
  Top Layer w0.152: v1(55.093,34.2) 55.095,34.198 U5.6
  Bottom Layer w0.152: R26.2 52.65,30.15 53.6,31.1 54.5,31.1 55.093,31.693 v1(55.093,34.2)
DRV18: R27.2 U5.5 | length 3
  Top Layer w0.152: R27.2 55.7,34.5 56.365,33.835 U5.5
DRV19: R28.2 U5.4 | length 3
  Top Layer w0.152: U5.4 57.635,33.935 58.45,34.75 R28.2
DRV20: R29.2 U5.3 | length 3
  Top Layer w0.152: U5.3 58.905,33.905 59.75,34.75 R29.2
DRV21: R30.2 U5.2 | length 4.2
  Top Layer w0.152: U5.2 60.175,33.375 61.2,34.4 62.2,34.4 62.55,34.75 R30.2
DRV22: R31.2 U5.1 | length 3.7
  Top Layer w0.152: U5.1 64.375,32.825 R31.2
DRV23: R32.2 U5.15 | length 16.6
  Top Layer w0.152: U5.15 60.175,28.275 60.9,29 v1(62.9,29)
  Bottom Layer w0.152: v1(62.9,29) 62.9,29.3 63.8,30.2 65.7,30.2 66,30.5 66,31.5 65.3,32.2 65.3,32.9 67.1,34.7 67.1,35.75 R32.2
DRV24: R33.2 U6.7 | length 2.4
  Top Layer w0.152: R33.2 19.825,35.225 U6.7
DRV25: R34.2 U6.6 | length 7.6
  Top Layer w0.152: v1(20.2,31.7) 20.3,31.7 21.095,32.495 U6.6
  Bottom Layer w0.152: R34.2 16.75,29.25 18.7,31.2 19.7,31.2 v1(20.2,31.7)
DRV26: R35.2 U6.5 | length 2.2
  Top Layer w0.152: U6.5 22.365,35.715 R35.2
DRV27: R36.2 U6.4 | length 2.7
  Top Layer w0.152: U6.4 23.635,34.285 R36.2
DRV28: R9.2 U6.3 | length 2.8
  Top Layer w0.152: U6.3 24.905,34.431 25.658,35.183 25.783,35.183 26.45,35.85 R9.2
DRV29: R37.2 U6.2 | length 8.1
  Top Layer w0.152: v1(26,32.2) 26,33.65 U6.2
  Bottom Layer w0.152: v1(26,32.2) 26,31.6 26.7,30.9 28.4,30.9 30.1,29.2 R37.2
DRV30: R38.2 U6.1 | length 4
  Top Layer w0.152: U6.1 27.445,34.245 v1(29.2,36)
  Bottom Layer w0.152: v1(29.2,36) 29.4,35.8 R38.2
DRV31: R40.2 U6.15 | length 18.7
  Top Layer w0.152: U6.15 26.175,28.585 27.047,29.457 v1(27.093,29.457)
  Bottom Layer w0.152: v1(27.093,29.457) 27.072,29.457 27.7,28.829 27.7,28.1 28.2,27.6 30.6,27.6 31.1,28.1 31.1,30.5 31.6,31 32.6,31 33,31.4 33,32.4 32,33.4 32,35.7 30.95,36.75 R40.2
GATE0: Q4.1 R6.1 | length 5.9
  Top Layer w0.152: R6.1 26.55,14.3 v1(29.068,14.3)
  Bottom Layer w0.152: v1(29.068,14.3) 30.05,15.282 Q4.1
GATE1: Q3.1 R5.1 | length 1.6
  Bottom Layer w0.152: R5.1 30.05,21.6 Q3.1
GATE2: Q2.1 R4.1 | length 1.9
  Bottom Layer w0.152: R4.1 25.05,20 Q2.1
GATE3: Q1.1 R3.1 | length 1.7
  Top Layer w0.152: R3.1 v1(24,14.1)
  Bottom Layer w0.152: v1(24,14.1) Q1.1
GATE4: Q5.1 R7.1 | length 5
  Top Layer w0.152: R7.1 21.8,15.4 v1(21.8,17.4)
  Bottom Layer w0.152: Q5.1 21.35,16.95 v1(21.8,17.4)
GATE5: Q6.1 R13.1 | length 7.2
  Top Layer w0.152: R13.1 14.9,15.35 14.9,16.8 15.4,17.3 16.6,17.3 17.2,17.9 v1(17.2,18.8)
  Bottom Layer w0.152: Q6.1 17.05,18.95 v1(17.2,18.8)
GATE6: Q7.1 R14.1 | length 3.6
  Top Layer w0.152: v1(13.6,18.1) 13.7,18 R14.1
  Bottom Layer w0.152: Q7.1 13,18.9 13.6,18.3 v1(13.6,18.1)
GATE7: Q8.1 R15.1 | length 12.9
  Top Layer w0.152: v1(17.4,21.6) 17.4,23.25 R15.1
  Bottom Layer w0.152: Q8.1 14.2,16.25 14.2,20.5 14.6,20.9 16.7,20.9 v1(17.4,21.6)
GATE8: Q12.1 R16.1 | length 4.7
  Top Layer w0.152: v1(64.5,12.8) 64.5,14.8 R16.1
  Bottom Layer w0.152: v1(64.5,12.8) 64.5,14.25 Q12.1
GATE9: Q11.1 R17.1 | length 5.1
  Top Layer w0.152: v1(64.8,17) 65.621,16.179 65.645,16.179 65.779,16.045 65.779,14.955 65.2,14.377 R17.1
  Bottom Layer w0.152: Q11.1 64.8,17.95 v1(64.8,17)
GATE10: Q10.1 R18.1 | length 6.4
  Top Layer w0.152: R18.1 62.35,14.15 62.8,14.6 v1(62.8,14.7)
  Bottom Layer w0.152: Q10.1 61.223,19 62.8,17.423 v1(62.8,14.7) v1@62.8,14.6
GATE11: Q9.1 R19.1 | length 3.3
  Top Layer w0.152: v1(57.9,14.7) 58.2,14.7 59.2,13.7 R19.1
  Bottom Layer w0.152: v1(57.9,14.7) 58.4,14.7 Q9.1
GATE12: Q13.1 R8.1 | length 2.7
  Top Layer w0.152: v1(54.352,14.848) 55.05,14.15 R8.1
  Bottom Layer w0.152: Q13.1 54.05,15.15 v1(54.352,14.848)
GATE13: Q14.1 R22.1 | length 7.5
  Top Layer w0.152: R22.1 52.15,14.65 v1(52.2,14.7)
  Bottom Layer w0.152: Q14.1 52.333,20.717 52.333,14.833 v1(52.2,14.7)
GATE15: Q16.1 R24.1 | length 1.9
  Bottom Layer w0.152: Q16.1 48,13.15 R24.1
GATE16: Q20.1 R25.1 | length 2.7
  Top Layer w0.152: v1(51,34) 51.45,34.45 R25.1
  Bottom Layer w0.152: Q20.1 v1(51,34)
GATE17: Q19.1 R26.1 | length 1.9
  Bottom Layer w0.152: Q19.1 49.95,29.8 R26.1
GATE18: Q18.1 R27.1 | length 4
  Top Layer w0.152: R27.1 54.2,35.3 54.559,34.941 54.559,34.259 54.443,34.143 v1(54.265,34.143)
  Bottom Layer w0.152: Q18.1 54,33.6 54.265,33.865 v1(54.265,34.143)
GATE19: Q17.1 R28.1 | length 2.4
  Top Layer w0.152: R28.1 v1(56.95,36.65)
  Bottom Layer w0.152: Q17.1 56.25,35.95 v1(56.95,36.65)
GATE20: Q21.1 R29.1 | length 2
  Top Layer w0.152: v1(60.5,34.75) R29.1
  Bottom Layer w0.152: v1(60.5,34.75) 60.95,34.3 Q21.1
GATE21: Q22.1 R30.1 | length 6.7
  Top Layer w0.152: v1(62.4,33.85) R30.1
  Bottom Layer w0.152: Q22.1 61,30.6 62.4,32 v1(62.4,33.85)
GATE22: Q23.1 R31.1 | length 2.8
  Top Layer w0.152: R31.1 65.75,32.7 v1(66.1,32.7)
  Bottom Layer w0.152: v1(66.1,32.7) 66.25,32.7 Q23.1
GATE23: Q24.1 R32.1 | length 1.9
  Bottom Layer w0.152: R32.1 68,36.35 Q24.1
GATE24: Q28.1 R33.1 | length 4.1
  Top Layer w0.152: v1(15,35.1) 15.8,35.9 R33.1
  Bottom Layer w0.152: Q28.1 14.95,35.05 v1(15,35.1)
GATE25: Q27.1 R34.1 | length 2.8
  Bottom Layer w0.152: Q27.1 13.9,30.05 R34.1
GATE26: Q26.1 R35.1 | length 5.3
  Top Layer w0.152: v1(20.3,32.5) 20.357,32.5 20.379,32.479 20.379,35.229 R35.1
  Bottom Layer w0.152: Q26.1 19.55,32.5 v1(20.3,32.5)
GATE27: Q25.1 R36.1 | length 3.9
  Top Layer w0.152: v1(21.421,36.9) 22.75,36.9 R36.1
  Bottom Layer w0.152: Q25.1 21,36.479 v1(21.421,36.9)
GATE28: Q29.1 R9.1 | length 7.5
  Top Layer w0.152: v1(25.1,32.3) 25.6,32.8 25.6,34.695 25.784,34.879 25.91,34.879 26.131,35.1 27.15,35.1 R9.1
  Bottom Layer w0.152: v1(25.1,32.3) 25.95,33.15 Q29.1
GATE29: Q30.1 R37.1 | length 1.8
  Bottom Layer w0.152: Q30.1 28.6,29.35 R37.1
GATE30: Q31.1 R38.1 | length 3.2
  Bottom Layer w0.152: R38.1 30.9,31.95 Q31.1
GATE31: Q32.1 R40.1 | length 1.7
  Bottom Layer w0.152: R40.1 33,36.85 Q32.1
GND: C2.1 C3.2 C4.2 C8.2 C9.2 C10.2 C11.2 C12.2 C13.2 C14.2 C15.2 C16.2 C17.2 C18.2 C19.2 IC1.1 J1.2 J5.4 J9.1 R20.1 R41.2 R42.1 U1.8 U1.13 U2.5 U3.15 U4.8 U4.13 U5.8 U5.13 U6.8 U6.13 U7.4 Y1.2 Y1.4 | length 250.2
  Top Layer w0.152: R20.1 3,32.4 4.3,31.1 4.6,30.8 ; U1.13 22.365,25.235 20.5,27.1 20.5,29.025 20.704,29.229 22.756,29.229 23.635,28.35 U6.13
  Top Layer w0.305: U2.5 43.25,27.95 44.1,27.1 46.6,27.1 47.805,28.305 52.978,28.305 53.185,28.098 53.185,26.181 53.383,25.983 54.33,25.983 54.465,26.118 54.465,28.098 54.977,28.61 56.914,28.61 57.635,27.889 U5.13 ; 59.228,20.228 59.535,20.535 59.535,23.865 59.459,23.941 ; U7.4@70.45,28.525 70.45,26.15 C17.2
  Top Layer w0.406: C10.2 33.175,18.725 U3.15 33.175,21.425 ; U5.13 57.635,25.765 59.459,23.941
  Top Layer w0.61: IC1.1 2.7,19.8 4,18.5 C8.2 C9.2 4,14.695 5.095,13.6 7,13.6 7.872,14.472 12.566,14.472 12.566,18.766 13.35,19.55 ; C15.2 11.4,24.1 12.8,22.7 12.8,20.407 13.657,19.55 C11.2 16.112,19.562 17.688,19.562 18.888,18.362 26.428,18.362 27.445,17.345 U1.8 27.67,16.4 v1(28.2,16.4) 29.85,14.75 30.04,14.75 31.59,13.2 36.8,13.2 37.3,12.7 42.5,12.7 43.3,13.5 46.3,13.5 49.2,16.4 v1(49.2,18.1) 49.55,18.45 C14.2 50.15,18.2 51.8,18.2 53.3,19.7 55.6,19.7 56.4,18.9 60.2,18.9 61.445,17.655 U4.8 ; 18.555,31.145 U6.8 ; 18.864,30.836 18.9,30.8 ; v3(29.6,19.7) 29.6,20.794 30.431,21.625 32.975,21.625 33.175,21.425 ; v1(49.5,21.4) 51.938,23.838 55.532,23.838 56.365,23.005 U4.13 56.365,20.635 56.772,20.228 59.228,20.228 ; U5.8 52.6,32.78 52.6,31.2 ; C13.2 C13.2@65.475,27.425 ; R42.1 65.85,27.05 C13.2@65.475,27.425 ; C13.2@65.475,27.425 65.45,27.45 65.35,27.55 65.45,27.55 65.6,27.55 C13.2@65.475,27.425
  Top Layer w0.813: IC1.1 2.7,29.5 4.3,31.1 ; 4.6,30.8 18.9,30.8 ; 18.864,30.836 20.971,30.836 21.421,31.286 27.146,31.286 29.41,33.55 C12.2 33.484,37.534 45.631,37.534 51.965,31.2 52.6,31.2 57.987,31.2 ; 57.987,31.2 63.717,31.2 65.45,29.467 65.45,27.55 65.45,27.45 C13.2
  Bottom Layer w0.61: v1(28.2,16.4) 28.2,18.2 29.6,19.6 v3(29.6,19.7) ; v1(49.2,18.1) 49,18.3 49,20.9 v1(49.5,21.4)
IMEAS: C20.2 R10.2 R12.2 U3.6 U7.6 | length 81.8
  Top Layer w0.152: U3.6 33.175,25.025 33.9,24.3 37.031,24.3 38.031,25.3 42.3,25.3 43,24.6 43,19.6 v1(42.8,19.4) ; R12.2 C20.2 71.069,31.45 73.344,29.175 73.575,29.175 ; U7.6@74.55,29.175 73.575,29.175 ; v1(74.767,27) R10.2 73.25,28.85 73.575,29.175
  Bottom Layer w0.152: v1(42.8,19.4) 42.833,19.433 44.867,19.433 46.695,17.605 46.695,12.774 52.474,6.995 62.326,6.995 68.835,13.504 68.835,21.004 74.767,26.936 v1(74.767,27)
IMEAS_RANGESEL: R11.2 R12.1 U3.17 | length 77.2
  Top Layer w0.152: U3.17 34.475,21.355 34.72,21.6 36.6,21.6 v1(38.2,20) ; R11.2 67.3,33.05 R12.1 69.05,34.35 70.12,33.28 70.12,32.83 71.85,31.1 74.667,31.1 v1(75,31.433)
  Bottom Layer w0.152: v1(38.2,20) 38.267,19.933 44.798,19.933 47,17.731 47,12.9 52.6,7.3 62.2,7.3 68.5,13.6 68.5,21.2 74.233,26.933 74.233,27.221 75,27.988 v1(75,31.433)
MOSI: U1.14 U3.10 | length 17.1
  Top Layer w0.152: U1.14 21.095,20.405 21.639,19.861 26.515,19.861 26.7,20.045 26.845,20.045 v1@26.795,20.095 ; v1(30.575,22.8) U3.10
  Bottom Layer w0.152: v1(26.7,20.1) 26.8,20.1 26.8,22.373 27.405,22.979 30.396,22.979 v1(30.575,22.8)
NetC20_1: C20.1 R10.1 R11.1 R42.2 U7.2 | length 10.1
  Top Layer w0.152: R42.2 C20.1 ; R11.1 67.2,31.35 C20.1 ; R10.1 71.75,29.65 71.575,29.825 U7.2 68.725,29.825 C20.1
NetLED1_1: LED1.1 R1.1 | length 4.2
  Top Layer w0.152: LED1.1 2,11.9 1.3,12.6 1.3,13.2 2,13.9 R1.1
NetLED2_1: LED2.1 R2.1 | length 2.3
  Top Layer w0.152: R2.1 3.75,11.1 LED2.1
NetQ15_1: Q15.1 R23.1 | length 5
  Top Layer w0.152: R23.1 v1(50.6,17.4)
  Bottom Layer w0.152: Q15.1 48,18.2 49.1,17.1 50.3,17.1 v1(50.6,17.4)
NetR39_2: R39.2 U7.3 | length 2.1
  Top Layer w0.305: R39.2 69.225,29.175 U7.3 U7.3@70.45,29.175
NLED1: LED1.2 U3.12 | length 42.4
  Top Layer w0.152: LED1.2 2,8.5 2.3,8.2 4.5,8.2 5,8.7 5,9.719 8.381,13.1 11.674,13.1 13.012,11.762 14.247,11.762 15.085,12.6 29.3,12.6 v1(29.6,12.3) ; U3.12 31.225,17.84 32.565,16.5 v1(33,16.5)
  Bottom Layer w0.152: v1(29.6,12.3) 33,15.7 v1(33,16.5)
NLED2: LED2.2 U3.13 | length 40
  Top Layer w0.152: LED2.2 4.2,9.35 8.255,13.405 11.8,13.405 13.139,12.067 14.121,12.067 14.959,12.905 30.295,12.905 v1(30.7,12.5) ; U3.13 31.867,20.292 31.867,17.629 32.456,17.04 v1(33.638,17.04)
  Bottom Layer w0.152: v1(30.7,12.5) 33.638,15.438 v1(33.638,17.04)
PGND: C1.2 C5.2 C6.2 C7.2 Q1.2 Q2.2 Q3.2 Q4.2 Q5.2 Q6.2 Q7.2 Q8.2 Q9.2 Q10.2 Q11.2 Q12.2 Q13.2 Q14.2 Q15.2 Q16.2 Q17.2 Q18.2 Q19.2 Q20.2 Q21.2 Q22.2 Q23.2 Q24.2 Q25.2 Q26.2 Q27.2 Q28.2 Q29.2 Q30.2 Q31.2 Q32.2 R39.1 R41.1 | length 2.3
  Top Layer w0.813: R41.1 68.6,25.6 R39.1
RESET: C4.1 J5.1 R21.1 U3.4 | length 37.1
  Top Layer w0.152: U3.4 34.475,25.144 34.819,24.8 37.1,24.8 37.905,25.605 42.595,25.605 43.4,24.8 ; v1(43.4,18.9) 43.4,24.8 ; C4.1 R21.1 43.45,24.75 43.4,24.8
  Bottom Layer w0.152: J5.1 41.19,3.59 41.8,4.2 41.8,7.9 41.4,8.3 41.4,14 43.1,15.7 43.1,18.6 v1(43.4,18.9)
RS485_DN: J1.4 U2.6 | length 53.1
  Top Layer w0.152: U2.6 41.135,29.935 41.595,30.395 46.505,30.395 47.8,29.1 54.291,29.1 54.486,29.295 57.198,29.295 58.705,29.295 59.5,28.5 59.5,25.969 65.669,19.8 82.58,19.8 J1.4
RS485_DP: J1.3 U2.7 | length 59.9
  Top Layer w0.152: U2.7 39.865,29.465 41.1,30.7 46.631,30.7 47.926,29.405 54.164,29.405 54.36,29.6 57.324,29.6 ; 57.325,29.6 63.055,29.6 63.433,29.221 63.433,28.779 63.054,28.4 61.225,28.4 60.8,27.975 60.8,25.1 65.795,20.105 82.645,20.105 J1.3
RX: U2.1 U3.9 | length 9
  Top Layer w0.152: U3.9 31.225,25.075 33.014,23.286 38.359,23.286 U2.1
SCLK: U1.11 U3.11 U4.11 U5.11 U6.11 | length 78.3
  Top Layer w0.152: U6.11 21.095,27.235 23.081,25.248 23.081,20.771 23.383,20.47 24.67,20.47 24.905,20.705 U1.11 24.905,22.405 25.683,23.183 27.962,23.183 28.303,22.842 28.303,19.468 32.414,15.357 33.657,15.357 34.233,15.933 34.933,15.933 v1(35.1,16.1) 35.285,16.1 38.095,18.91 41.028,18.91 42.423,17.515 43.769,17.515 44.444,18.19 45.536,18.19 51.779,24.433 55.736,24.433 57.081,23.088 57.081,20.934 57.244,20.771 58.371,20.771 58.905,21.305 U4.11 58.905,23.884 56.919,25.871 56.919,28.066 56.756,28.229 55.444,28.229 55.095,27.88 U5.11 ; U3.11 30.575,18.059 32.667,15.967 33.367,15.967 v1(34.4,17)
  Bottom Layer w0.152: v1(34.4,17) 34.4,16.8 v1(35.1,16.1)
STROBE: U1.12 U3.18 U4.12 U5.12 U6.12 | length 59.6
  Top Layer w0.152: U6.12 22.365,26.535 23.705,25.195 U1.12@23.705,22.07 ; U1.12 23.635,22 U1.12@23.705,22.07 ; U3.18 35.125,19.475 35.705,18.895 36.405,18.895 37.027,18.273 ; U5.12 56.365,24.235 ; U4.12 57.635,22.965 56.365,24.235 ; U1.12@23.705,22.07 25.123,23.488 28.089,23.488 28.608,22.969 28.608,19.594 32.541,15.662 33.531,15.662 34.107,16.238 34.392,16.238 34.605,16.45 34.833,16.679 35.433,16.679 37.027,18.273 ; 37.027,18.273 37.969,19.214 41.155,19.214 42.549,17.82 43.643,17.82 44.318,18.495 45.41,18.495 51.653,24.738 55.862,24.738 56.365,24.235
SWCLK: J5.2 U3.20 | length 15.9
  Top Layer w0.152: U3.20 36.825,19.9 v1(37.2,19.9)
  Bottom Layer w0.152: v1(37.2,19.9) 38.105,18.995 38.105,8.125 J5.2
SWDIO: J5.3 U3.19 | length 23.7
  Top Layer w0.152: U3.19 35.775,19.425 36,19.2 37,19.2 v1(37.1,19.1)
  Bottom Layer w0.152: v1(37.1,19.1) 37.8,18.4 37.8,6.5 39.433,4.867 40.871,4.867 41.4,5.395 41.4,7.37 J5.3 ; J5.3@40.1,8.87 J5.3@40.2,8.77
TX: U2.4 U3.8 | length 16.4
  Top Layer w0.152: U3.8 31.875,25.125 33.41,23.59 37.262,23.59 38.2,24.529 39.071,24.529 39.2,24.4 39.2,21.997 39.625,21.571 42.271,21.571 42.405,21.705 U2.4
TXEN: U2.2 U2.3 U3.7 | length 11.9
  Top Layer w0.152: U3.7 32.525,25.175 33.805,23.895 37.057,23.895 37.995,24.833 39.467,24.833 39.865,24.435 U2.2 39.976,23.161 41.024,23.161 U2.3
VCC: C10.1 C11.1 C12.1 C13.1 C14.1 C15.1 IC1.2 IC1.4 J4.1 R1.2 R2.2 R21.2 R43.1 R44.1 U1.16 U2.8 U3.16 U4.16 U5.16 U6.16 | length 225.6
  Top Layer w0.152: J4.1@1.8,39.37 0.6,38.17 0.6,35.2 1.2,34.6 1.2,16.8 R1.2 2,15.7 2.8,14.9 2.8,14 ; R2.2 2.5,13 2.8,13.3 2.8,14 ; 8.5,26.1 8.5,21 11.75,17.75 v1(11.75,15.25) ; v1(12.25,13.71) 7.864,13.71 7.221,13.067 4.807,13.067 3.873,14 2.8,14 ; U2.8 38.595,26.805 39.15,26.25 R21.2
  Top Layer w0.406: 18.5,20.2 18.555,20.255 U1.16 ; C14.1@50.3,19.95 52.175,21.825 U4.16 ; U5.16 63.5,27.175 C13.1@63.725,27.4 ; C13.1 63.95,25.75 67.1,22.6 R44.1
  Top Layer w0.508: U3.16 33.825,18.725 C10.1
  Top Layer w0.61: U6.16 28.441,28.175 ; 28.441,30.736 28.441,28.175 ; R43.1 29.1,27.516 28.441,28.175
  Top Layer w0.813: IC1.2 IC1.4 6.85,26.1 8.5,26.1 C15.1 12.6,26.1 ; C10.1 35.327,18.3 v2(35.328,18.228) ; v2(37.1,15.9) 37.1,14.1 ; U2.8 38.595,29.195 40.765,31.365 47.07,31.365 48.335,30.1 53.9,30.1 54.035,30.235 57.587,30.235 ; 47.07,31.55 47.07,34.73 45.232,36.568 34.268,36.568 29.75,32.05 C12.1 29.5,31.779 28.458,30.736 28.441,30.736 28.025,30.321 21.821,30.321 21.371,29.871 19.336,29.871 19.3,29.835 16.335,29.835 12.6,26.1 ; C14.1@50.3,19.95 50.277,19.927 49.127,19.927 47,17.8 47,16.5 45.082,14.582 43.173,14.582 43.167,14.588 42.179,13.6 37.8,13.6 37.3,14.1 37.1,14.1 ; 57.588,30.235 63.318,30.235 64.068,29.484 64.068,27.518 C13.1 ; 12.6,26.1 15.1,23.6 15.1,22.05 C11.1 16.55,20.6 18.1,20.6 18.5,20.2 19.474,19.226 26.786,19.226 31.899,14.112 35.196,14.112 35.208,14.1 37.1,14.1
  Bottom Layer w0.152: v1(11.75,15.25) 12.25,14.75 v1(12.25,13.71)
  Bottom Layer w0.813: v2(35.328,18.228) 35.9,18.228 35.936,18.264 37.1,17.1 v2(37.1,15.9)
XT1: C2.2 U3.2 Y1.1 | length 8.3
  Top Layer w0.152: U3.2 35.775,26.525 34.2,28.1 34.2,29.5 Y1.1 36.1,31.4 C2.2
XT2: C3.1 U3.3 Y1.3 | length 9.5
  Top Layer w0.152: Y1.3 Y1.3@32.45,28.75 ; C3.1 33.9,32.365 33.9,30.2 Y1.3@32.45,28.75 ; U3.3 35.125,26.675 33.05,28.75 Y1.3@32.45,28.75
pads on no net: Designator1.1 Designator2.1 Designator3.1 Designator4.1 Designator5.1 Designator6.1 J2.3 J3.3 J6.3 J7.3 U6.9 U7.1 U7.5 U7.8

## Polygon pours and split planes (outlines as drawn)
+12V on Top Layer "VCC_TOP" (solid, pour order 12): 0,0 90,0 90,50 0,50 0,0
GND on Top Layer "GND_TOP" (solid, pour order 10): 2.634,15.937 6.684,11.887 69.184,11.887 81.434,24.137 81.434,30.237 81.434,30.837 80.434,31.837 80.234,32.037 72.834,32.037 72.334,32.037 66.534,37.837 66.334,38.037 15.934,38.037 9.934,38.037 2.634,30.737
GND on Top Layer "GND_TOP" (solid, pour order 8): 85,30 75,30 75,27 69,21 69,12 80,12 80,21 84,25 86,25 87,26 87,28
+12V on Bottom Layer "VCC_BOT" (solid, pour order 6): 0,0 90,0 90,50 0,50
PGND on Bottom Layer "PGND_BOT" (solid, pour order 5): 8,22 8,21 12,17 17,12 75,12 75,32 72,32 70,34 66,38 51,38 15.2,38 11.2,34 11.2,32.7 8,29.5 8,29
GND on Bottom Layer "GND_BOT" (solid, pour order 4): 80,12 71,12 68,12 69,12 69,21 75,27 75,30 85,30 87,28 87,26 86,25 84,25 80,21

## Keep-outs
Keep-Out Layer:
  the board outline again, w0.254

## Silkscreen, mask and mechanical layers (free items; w line width, h text height)
Top Overlay:
  lines w0.254: 45.4,25.6 47.1,25.8
  text "cc-by-sa" at 75.4,38.9 h3 r90
  text "2017" at 78.2,38.897 h3 r90
  text "BOOT0" at 5.2,35.8 h1.02 r90
  text "+12V" at 73.7,35.8 h1.52
  text "GND" at 75,12.6 h1.52
  text "olsndot" at 75.4,1.7 h3 r90
  text ".revision" at 77.9,1.7 h3 r90
Mechanical 16:
  lines w0.127: -75,-39.24 -69.92,-39.24 ; -75,9.02 -69.92,9.02 ; -75,57.28 -69.92,57.28 ; -2.055,100.42 -2.055,105.5 ; -1.975,-87.5 -1.975,-82.42 ; 70.97,100.42 70.97,105.5 ; 71.05,-87.5 71.05,-82.42 ; 97.72,-74.8 212.02,-74.8 ; 97.72,-67.18 212.02,-67.18 ; 97.72,-59.56 135.82,-59.56 ; 135.82,-82.42 135.82,-67.18 135.82,-51.94 ; 143.995,100.42 143.995,105.5 ; 144.075,-87.5 144.075,-82.42 ; 189.16,-82.42 189.16,-67.18 ; 212.02,-39.24 217.1,-39.24 ; 212.02,9.02 217.1,9.02 ; 212.02,57.28 217.1,57.28 ; 97.72,-82.42 97.72,-51.94 ; 97.72,-82.42 212.02,-82.42 ; 97.72,-82.42 62.16,-82.42 62.16,-51.94 97.72,-51.94 ; 97.72,-51.94 135.82,-51.94 ; 135.82,-51.94 212.02,-51.94 212.02,-82.42 ; 212.02,-82.42 212.02,100.46 -69.92,100.46 -69.92,-82.42 212.02,-82.42 ; -75,-87.5 -75,105.54 217.1,105.54 217.1,-87.5 -75,-87.5
  text "2" at 33.89,102.111 h1.78
  text "3" at 107.042,102.111 h1.78
  text "1" at -38.834,102.071 h1.78
  text "4" at 179.86,102.071 h1.78
  text "A" at -73.095,79.099 h1.78
  text "A" at 213.925,79.099 h1.78
  text "NOTE: Use paper washers under heatsink screws" at 5.7,65.7 h1.52
  text "1" at 15.246,36.111 h1.78
  text "B" at -73.095,31.042 h1.78
  text "B" at 213.925,31.042 h1.78
  text "4" at 31.947,-7.889 h1.78
  text "C" at -73.095,-17.472 h1.78
  text "C" at 214,-18 h1.78
  text "ENGINEER:" at 98.99,-54.48 h1.14
  text "TITLE:" at 137.09,-54.48 h1.14
  text "Olsndot LED Driver" at 144.5,-58.6 h6
  text "PCB DESIGNER:" at 98.99,-61.973 h1.14
  text "Development version" at 144.7,-62.7 h3
  text "D" at -73.095,-65.478 h1.78
  text "D" at 213.925,-65.478 h1.78
  text "DATE:" at 98.99,-69.72 h1.14
  text "PART NO.:" at 137.09,-69.72 h1.14
  text "REV:" at 190.43,-69.72 h1.14
  text ".revision" at 195.2,-71.7 h3
  text ".PRINT_DATE" at 100.26,-72.768 h1.78
  text "FILE NAME:" at 98.99,-77.34 h1.14
  text "DWG NO:" at 137.09,-77.34 h1.14
  text "SCALE:" at 190.43,-77.34 h1.14
  text ".PCB_FILE_NAME_NO_PATH" at 100.26,-80.388 h1.78
  text "1" at -38.754,-85.849 h1.78
  text "2" at 33.89,-85.849 h1.78
  text "3" at 107.042,-85.849 h1.78
  text "4" at 179.94,-85.849 h1.78

## Dimensions
42.1,0.58 to 37.9,-4 on Mechanical 16
37.895,0.5 to 7.095,0.5 on Mechanical 16
7.095,0.5 to 0,5 on Mechanical 16
0,0 to 90,0 on Mechanical 16
45,16.5 to 68,25 on Mechanical 16
68,26.5 to 72.9,37.6 on Mechanical 16
42.1,50 to 5,0 on Mechanical 16

## Text inside footprints (layer, text, board x,y; h text height)
J2: Top Overlay "1" at 28.285,14.875 h1.5 r180; Top Overlay "5" at 17.455,14.875 h1.5 r180; Top Overlay "9" at 18.84,5.475 h1.5 r180; Top Overlay "6" at 27.15,5.475 h1.5 r180
J3: Top Overlay "1" at 63.29,14.955 h1.5 r180; Top Overlay "5" at 52.46,14.955 h1.5 r180; Top Overlay "9" at 53.845,5.555 h1.5 r180; Top Overlay "6" at 62.155,5.555 h1.5 r180
J6: Top Overlay "1" at 51.71,35.625 h1.5; Top Overlay "5" at 62.54,35.625 h1.5; Top Overlay "9" at 61.155,45.025 h1.5; Top Overlay "6" at 52.845,45.025 h1.5
J7: Top Overlay "1" at 16.71,35.625 h1.5; Top Overlay "5" at 27.54,35.625 h1.5; Top Overlay "9" at 26.155,45.025 h1.5; Top Overlay "6" at 17.845,45.025 h1.5